# Altium PCB VFD_CLOCK.PcbDoc
Units mil, origin at the board's own origin, x right, y up, seen from the top; angles counter-clockwise.
Board outline 3937.01 x 2519.68 mil, 2 copper layers (Top Layer, Bottom Layer); 41 components, 27 nets, 133 pads, 34 vias.
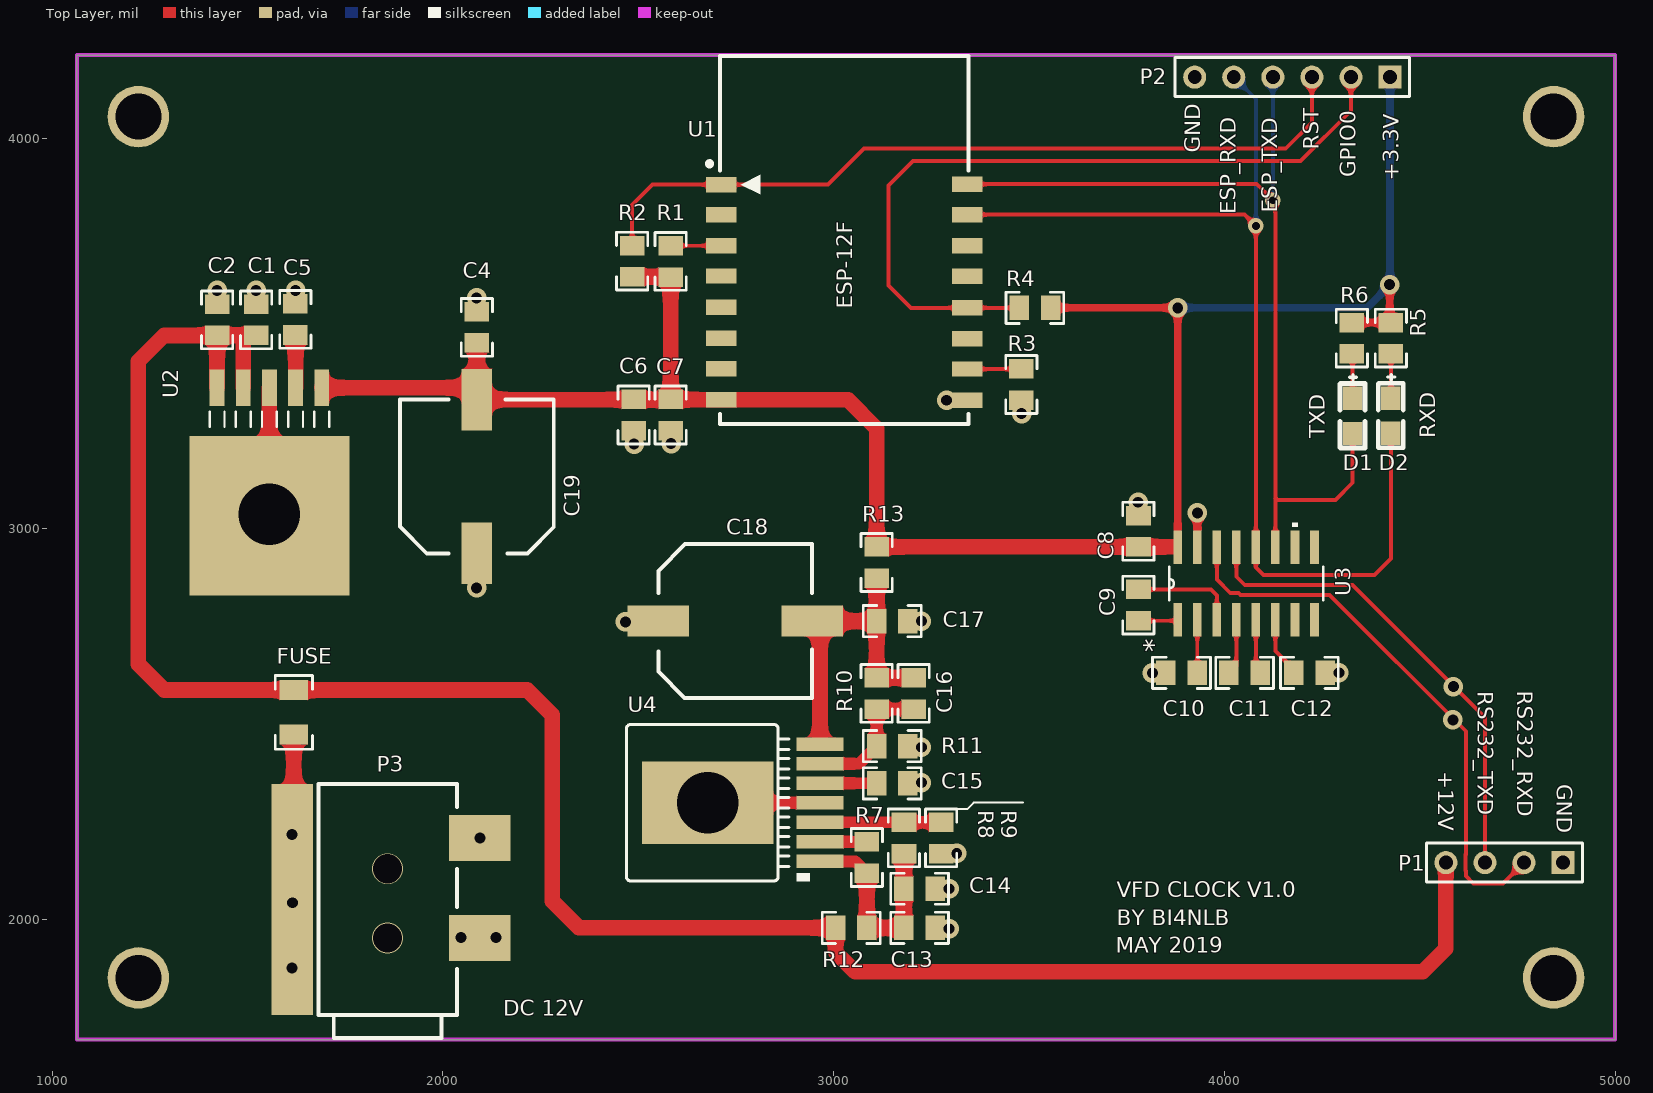
[diagram p0: Top Layer view]
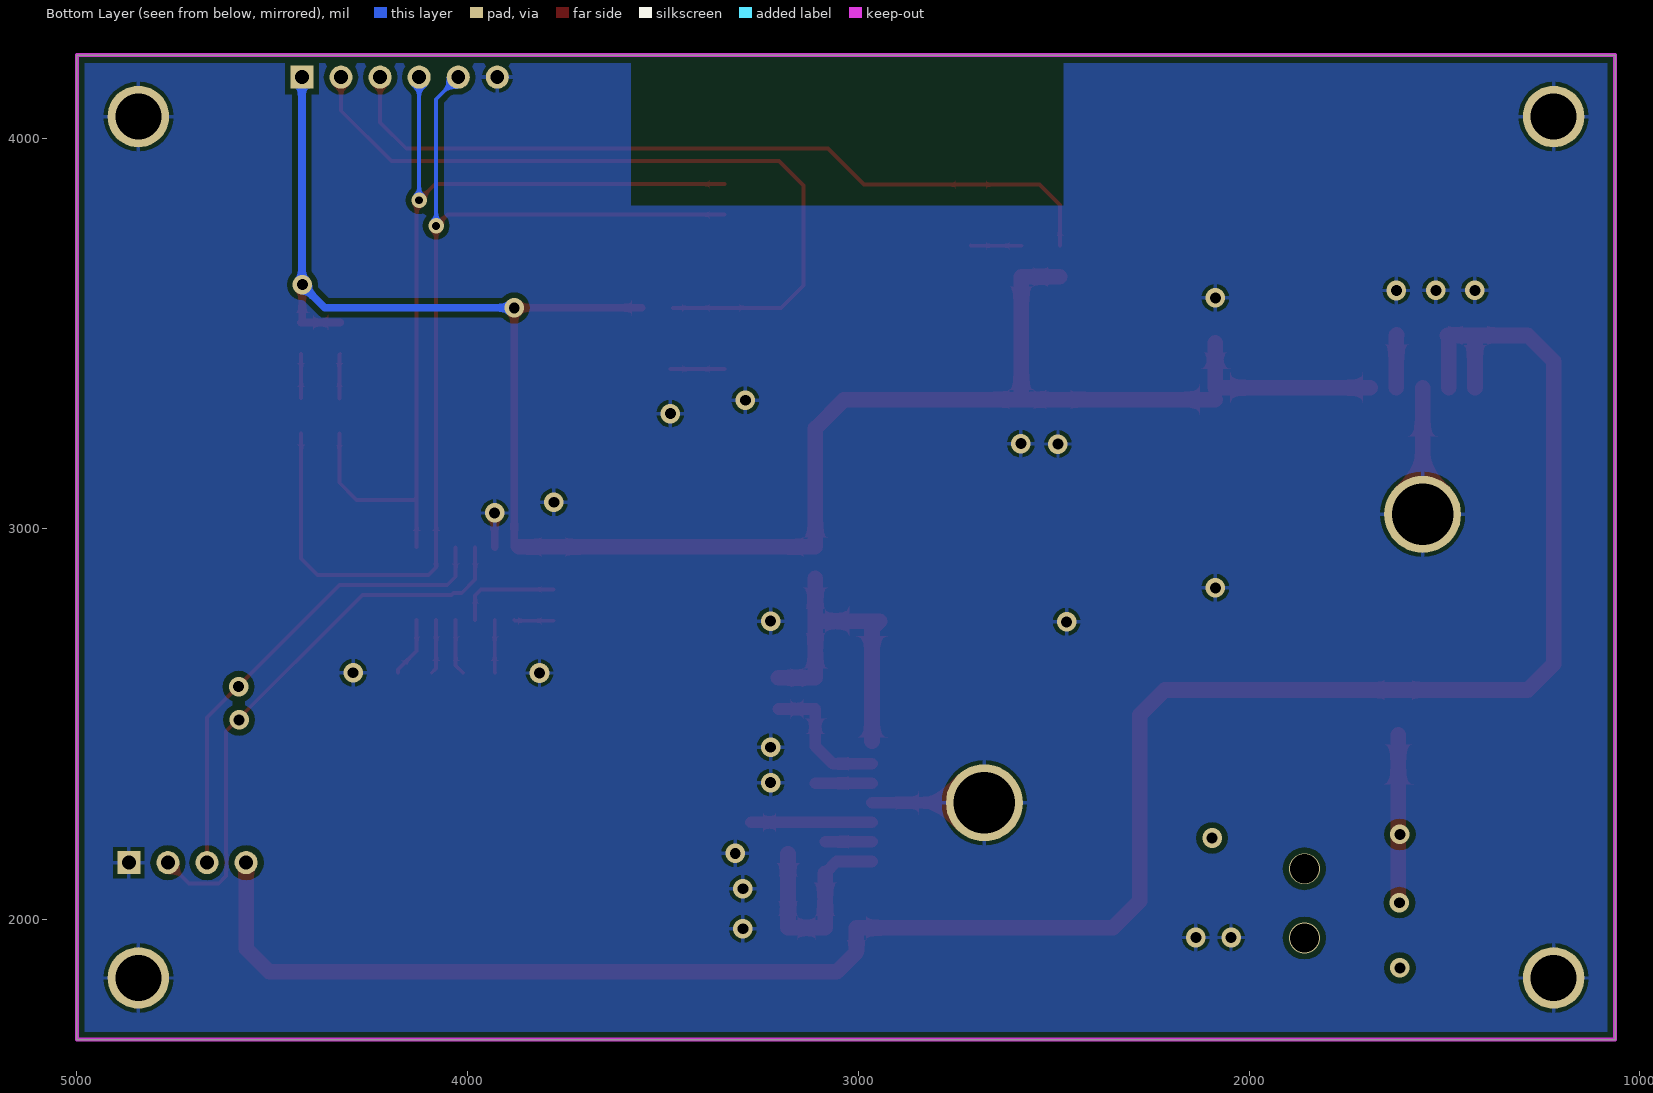
[diagram p1: Bottom Layer view, seen from below]

## Layer stack, top to bottom
Top Solder: solder mask 0.4, Solder Resist, Dk 3.5
Top Layer: signal copper 1.4
Dielectric 1: dielectric 12.6, FR-4, Dk 4.8
Bottom Layer: signal copper 1.4
Bottom Solder: solder mask 0.4, Solder Resist, Dk 3.5

## Board outline
1062.99,1692.91 1062.99,4212.6 5000,4212.6 5000,1692.91

## Design rules (kind name [scope] priority, off if disabled: settings)
Clearance [All] p1: gap=15 ignorepadtopadclearanceinfootprint=FALSE
HoleSize [All] p1: absolutevalues=TRUE maxlimit=200 minlimit=1 maxpercent=80.000 minpercent=20.000
PolygonConnect [All] p1: connectstyle=Relief reliefconductorwidth=10 reliefentries=4 polygonreliefangle="90 Angle" airgapwidth=10
RoutingVias [All] p1: holewidth=28 width=50 viastyle="Through Hole" minholewidth=10 minwidth=20 maxholewidth=28 maxwidth=50
SilkToSilkClearance [All] p1: silktosilkclearance=0
SilkToSolderMaskClearance [IsPad] p1: minsilkscreentomaskgap=0 clearancetoexposedcopper=TRUE
SolderMaskExpansion [All] p1: expansion=4
Width [All] p1: maxlimit=100 minlimit=10 preferedwidth=10 minimp=50.000000 maximp=50.000000 favimp=50.000000
27 further rules are at their usual default settings.

## Components (designator, comment, footprint, x,y, rotation, side; value= is the part's Value field where it differs from the comment)
C1 "0805YD106KAT2A" 0805_HV 1521.77,3534.88 r90 top value=10uF
C2 "08051C103JAT2A" 0805_HV 1421.77,3534.88 r90 top value=0.01uF
C4 "08051C103JAT2A" 0805_HV 2086.61,3515.75 r90 top value=0.01uF
C5 "08051C103JAT2A" 0805_HV 1622.05,3536.07 r90 top value=0.01uF
C6 "0805YD106KAT2A" 0805_HV 2488.19,3291.34 r270 top value=10uF
C7 "08051C103JAT2A" 0805_HV 2582.68,3291.34 r270 top value=0.01uF
C8 "08051C103JAT2A" 0805_HV 3780,2993.78 r90 top value=0.01uF
C9 "08051C103JAT2A" 0805_HV 3780,2804.8 r270 top value=0.01uF
C10 "08051C103JAT2A" 0805_HV 3890.24,2631.57 r180 top value=0.01uF
C11 "08051C103JAT2A" 0805_HV 4051.65,2631.57 r180 top value=0.01uF
C12 "08051C103JAT2A" 0805_HV 4217.64,2631.57 r0 top value=0.01uF
C13 "0805YD106KAT2A" 0805_HV 3219.88,1978.78 r180 top value=10uF
C14 "08051C103JAT2A" 0805_HV 3219.88,2078.78 r180 top value=0.01uF
C15 "08051C103JAT2A" 0805_HV 3149.88,2348.78 r180 top value=0.01uF
C16 "08051C103JAT2A" 0805_HV 3204.88,2578.78 r90 top value=0.01uF
C17 "08051C103JAT2A" 0805_HV 3149.88,2763.78 r180 top value=0.01uF
C18 "100uF" CAP 2944.88,2960.63 r270 top
C19 "100uF" CAP 1889.76,3330.71 r0 top
D1 "RED" LED0805 4328,3289 r270 top
D2 "RED" LED0805 4426.03,3289.31 r270 top
FUSE "" 1206 1618.11,2530.21 r90 top
P1 "Header 4" HDR1X4 4866.93,2145.67 r180 top locked
P2 "Header 6" HDR1X6 4424,4156 r180 top
P3 "Used in BOM report" PWR5.5 2035.43,1755.91 r90 top
R1 "CRCW080510K0FKEA" 0805_HV 2582.68,3684.41 r270 top value=10.0k
R2 "CRCW080510K0FKEA" 0805_HV 2484.25,3685.04 r270 top value=10.0k
R3 "CRCW080510K0FKEA" 0805_HV 3480.32,3369.45 r90 top value=10.0k
R4 "CRCW080510K0FKEA" 0805_HV 3515,3565.59 r180 top value=10.0k
R5 "CRCW080510K0FKEA" 0805_HV 4426,3488 r270 top value=10.0k
R6 "CRCW080510K0FKEA" 0805_HV 4326,3488 r270 top value=10.0k
R7 "CRCW080510K0FKEA" 0805_HV 3084.88,2158.78 r270 top value=10.0k
R8 "CRCW080510K0FKEA" 0805_HV 3179.88,2208.78 r90 top value=10.0k
R9 "CRCW080510K0FKEA" 0805_HV 3274.88,2208.78 r270 top value=10.0k
R10 "CRCW080510K0FKEA" 0805_HV 3109.88,2578.78 r90 top value=10.0k
R11 "CRCW080510K0FKEA" 0805_HV 3149.88,2443.78 r0 top value=10.0k
R12 "CRCW080510K0FKEA" 0805_HV 3044.88,1978.78 r0 top value=10.0k
R13 "CRCW080510K0FKEA" 0805_HV 3109.88,2913.78 r90 top value=10.0k
U1 "ESP-12" ESP_12 2712.13,3880.94 r0 top
U2 "REG104-33" TO-263 1555.69,3037.06 r180 top value=Value
U3 "MAX3232_D_16" D16 4055.59,2859.92 r90 top value=Value
U4 "LMZ14203TZ-ADJ/N" NDW0007A 2677.28,2298.78 r180 top value=Value

## Footprints (in the part's own frame and the unit in brackets; to place one, negate y for a bottom-side part, rotate by r counter-clockwise, add the part's x,y. Pads: shape width x height; smd on the part's side, far side on the other; paste and mask are expansions set on the pad)
0805_HV [mil] "0805 with 30mil clearance between pads"
  rect 50x63 smd: 1(-40,0) 2(40,0)
  silkscreen extent -74,-40 74,40, body extent -43,-29 43,29, height 57
1206 [mm] "1206 from SM-752 data"
  rect 1.3x1.85 smd: 1(-1.45,0) 2(1.45,0)
  silkscreen extent -2.4,-1.21 2.4,1.21, body extent -1.7,-0.9 1.7,0.9, height 1.35
CAP [mm]
  rect 2x4 smd: 1(5,0) 2(5,-10)
  silkscreen extent 0,-10 10,0
D16 [mil]
  rect 86x22 smd: 1(-93,175) 2(-93,125) 3(-93,75) 4(-93,25) 5(-93,-25) 6(-93,-75) 7(-93,-125) 8(-93,-175) 9(93,-175) 10(93,-125) 11(93,-75) 12(93,-25) 13(93,25) 14(93,75) 15(93,125) 16(93,175)
  silkscreen extent -43,-197 156,197, body extent -122,-197 122,197, height 69
ESP_12 [mm]
  rect 2x1 smd: 1(0,0) 2(0,-1.97) 3(0,-3.97) 4(0,-5.94) 5(0,-7.98) 6(0,-9.99) 7(0,-11.98) 8(0,-13.99) 9(16,-14.03) 10(16,-11.99) 11(16,-10.03) 12(16,-8.01) 13(16,-5.95) 14(16,-3.97) 15(16,-1.95) 16(16,0.03)
  silkscreen extent -0.91,-15.57 16.08,8.37
HDR1X4 [mm] "Connector; Header; 4 Position"
  rect 1.5x1.5 hole 0.9: 1(0,0)
  round 1.5 hole 0.9: 2(2.54,0) 3(5.08,0) 4(7.62,0)
  silkscreen extent -1.27,-1.27 8.89,1.27
HDR1X6 [mm] "Connector; Header; 6 Position"
  rect 1.5x1.5 hole 0.9: 1(0,0)
  round 1.5 hole 0.9: 2(2.54,0) 3(5.08,0) 4(7.62,0) 5(10.16,0) 6(12.7,0)
  silkscreen extent -1.27,-1.27 13.97,1.27
LED0805 [mil]
  rect 60x50 smd: 1(-45,0) 2(45,0)
  silkscreen extent -106,-32 82,32
NDW0007A [mm]
  rect 3.06x0.89 smd paste+0 mask+0.051: 1(-7.305,3.81) 2(-7.305,2.54) 3(-7.305,1.27) 4(-7.305,0) 5(-7.305,-1.27) 6(-7.305,-2.54) 7(-7.305,-3.81)
  rect 8.54x5.35 smd paste+0 mask+0.051: 8(0,0)
  silkscreen extent -6.65,-5.09 5.27,5.1, body extent 0,0 0.25,0.25, height 0.25
PWR5.5 [mm]
  rect 15x2.7 smd: 1(7.5,10.7)
  rect 3x4 smd: 2(5,-1.5) 3(11.5,-1.5)
  silkscreen extent -1.5,0 15,9
TO-263 [mil]
  rect 38x94 smd: 1(-134,-324) 2(-67,-324) 3(0,-324) 4(67,-324) 5(134,-324)
  rect 410x408 smd: 6(0,4)
  silkscreen extent -153,-263 153,-224, body extent -205,-278 205,200, height 189

## Part data
C1 C6 C13: "CAP, CERM, 10 µF, 16 V, +/- 10%, X5R, 0805", Cap_Case=0805, Manufacturer=AVX, Supplier Part Number 1=478-5165-1-ND, TempCo=X5R, Tolerance_%=10, Value1=Unknown, Value2=16V, ValueDisplayed=10µF, AEC Category=Q200, AEC Grade=N/A, AEC Qualified=N, Cap_F=0.00001, ComponentLink1Description="Datasheet link", ComponentLink1URL=http://datasheets.avx.com/cx5r.pdf, CompType=Capacitor, LatestRevisionDate=2016-08-09, MountType=SMT, PackageReference=0805, PartNumber=0805YD106KAT2A, Polarized=N, Published=2008-06-19, Publisher="Texas Instruments", RoHS=Y, SizeArea_mm2=2.5, SizeAreaWB_mm2=6.75, SizeX_mm=2, SizeY_mm=1.25, SizeZ_mm=1.45, Supplier 1=Digi-Key, Supplier 2=Mouser, Supplier 3=Farnell, Supplier Part Number 2=581-0805YD106K, Supplier Part Number 3=2281019, SymbolVersion=2008-07-09, TaMax_C=85, TaMin_C=-55, Technology=Ceramic, U/M=EA, VDC_V=16
C2 C4 C5 C7 C8 C9 C10 C11 C12 C14: "CAP, CERM, 0.01 µF, 100 V, +/- 5%, X7R, 0805", Cap_Case=0805, Manufacturer=AVX, Supplier Part Number 1=478-3745-1-ND, TempCo=X7R, Tolerance_%=5, Value1="0.078 ohm", Value2=100V, ValueDisplayed=0.1µF, AEC Category=Q200, AEC Grade=N/A, AEC Qualified=N, Cap_F=0.00000001, ComponentLink1Description="Datasheet link", ComponentLink1URL=http://datasheets.avx.com/X7RDielectric.pdf, CompType=Capacitor, ESR_ohm=0.078, LatestRevisionDate=2016-08-09, MountType=SMT, PackageReference=0805, PartNumber=08051C103JAT2A, Polarized=N, Published=2008-06-19, Publisher="Texas Instruments", RoHS=Y, SizeArea_mm2=2.5, SizeAreaWB_mm2=6.75, SizeX_mm=2, SizeY_mm=1.25, SizeZ_mm=1.45, Supplier 1=Digi-Key, Supplier 2=Mouser, Supplier 3=Farnell, Supplier Part Number 2=581-08051C103J, Supplier Part Number 3=1396066, SymbolVersion=2008-07-09, TaMax_C=125, TaMin_C=-55, Technology=Ceramic, U/M=EA, VDC_V=100
C15 C16: "CAP, CERM, 0.01 µF, 100 V, +/- 5%, X7R, 0805", Cap_Case=0805, Manufacturer=AVX, Supplier Part Number 1=478-3745-1-ND, TempCo=X7R, Tolerance_%=5, Value1="0.078 ohm", Value2=100V, ValueDisplayed=22nF, AEC Category=Q200, AEC Grade=N/A, AEC Qualified=N, Cap_F=0.00000001, ComponentLink1Description="Datasheet link", ComponentLink1URL=http://datasheets.avx.com/X7RDielectric.pdf, CompType=Capacitor, ESR_ohm=0.078, LatestRevisionDate=2016-08-09, MountType=SMT, PackageReference=0805, PartNumber=08051C103JAT2A, Polarized=N, Published=2008-06-19, Publisher="Texas Instruments", RoHS=Y, SizeArea_mm2=2.5, SizeAreaWB_mm2=6.75, SizeX_mm=2, SizeY_mm=1.25, SizeZ_mm=1.45, Supplier 1=Digi-Key, Supplier 2=Mouser, Supplier 3=Farnell, Supplier Part Number 2=581-08051C103J, Supplier Part Number 3=1396066, SymbolVersion=2008-07-09, TaMax_C=125, TaMin_C=-55, Technology=Ceramic, U/M=EA, VDC_V=100
C17: "CAP, CERM, 0.01 µF, 100 V, +/- 5%, X7R, 0805", Cap_Case=0805, Manufacturer=AVX, Supplier Part Number 1=478-3745-1-ND, TempCo=X7R, Tolerance_%=5, Value1="0.078 ohm", Value2=100V, ValueDisplayed=0.1uF, AEC Category=Q200, AEC Grade=N/A, AEC Qualified=N, Cap_F=0.00000001, ComponentLink1Description="Datasheet link", ComponentLink1URL=http://datasheets.avx.com/X7RDielectric.pdf, CompType=Capacitor, ESR_ohm=0.078, LatestRevisionDate=2016-08-09, MountType=SMT, PackageReference=0805, PartNumber=08051C103JAT2A, Polarized=N, Published=2008-06-19, Publisher="Texas Instruments", RoHS=Y, SizeArea_mm2=2.5, SizeAreaWB_mm2=6.75, SizeX_mm=2, SizeY_mm=1.25, SizeZ_mm=1.45, Supplier 1=Digi-Key, Supplier 2=Mouser, Supplier 3=Farnell, Supplier Part Number 2=581-08051C103J, Supplier Part Number 3=1396066, SymbolVersion=2008-07-09, TaMax_C=125, TaMin_C=-55, Technology=Ceramic, U/M=EA, VDC_V=100
C18 C19: library part Cap_100uF, Alternate Manufacturer=-, Manufacturer="Used in BOM report", Alternate PartNumber=-, ComponentLink1Description="Datasheet Link", CompType="Used in some BOM reports.  Useful for finding later.", MountType="SMT, TH, or N/A", PackageReference="eg:  0603, used in PnP report", PartNumber="Used in BOM report", RoHS="Used in BOM report.  Use Y or N."
D1 D2: library part LED, "LED发光管"
FUSE: library part R, "电阻"
P1: "Header, 4-Pin", LatestRevisionDate=17-Jul-2002, LatestRevisionNote="Re-released for DXP Platform.", Publisher="Altium Limited"
P2: "Header, 6-Pin", LatestRevisionDate=17-Jul-2002, LatestRevisionNote="Re-released for DXP Platform.", Publisher="Altium Limited"
P3: library part PWR5.5, Alternate Manufacturer=-, Alternate PartNumber=-, ComponentLink1Description="Datasheet Link", CompType="Used in some BOM reports.  Useful for finding later.", Manufacturer="Used in BOM report", MountType="SMT, TH, or N/A", PackageReference="eg:  0603, used in PnP report", PartNumber="Used in BOM report", RoHS="Used in BOM report.  Use Y or N."
R1 R2 R3 R4: "RES, 10.0 k, 1%, 0.125 W, 0805", Manufacturer=Vishay-Dale, Power_W=0.125, Supplier Part Number 1=541-10.0KCCT-ND, TempCo="100 ppm/C", Tolerance_%=1, Value1=1%, Value2=0.125W, Value_Code=10k0, ValueDisplayed=10.0k, AEC Category=Q200, AEC Qualified=?, ComponentLink1Description="Datasheet link", ComponentLink1URL=http://www.vishay.com/docs/20035/dcrcwe3.pdf, CompType=Resistor, EIA_Code=E96, LatestRevisionDate=2016-08-02, MountType=SMT, PackageReference=0805, PartNumber=CRCW080510K0FKEA, Published=2008-06-26, Publisher="Texas Instruments", Res_ohm=10000, RoHS=Y, SizeArea_mm2=2.5, SizeX_mm=2, SizeY_mm=1.25, SizeZ_mm=1.45, Supplier 1=Digi-Key, Supplier 2=Mouser, Supplier 3=Farnell, Supplier Part Number 2=71-CRCW0805-10K-E3, Supplier Part Number 3=1469856, SymbolVersion=2009-05-29, Technology="Thick Film", U/M=EA, VDC_V=150
R5 R6: "RES, 10.0 k, 1%, 0.125 W, 0805", Manufacturer=Vishay-Dale, Power_W=0.125, Supplier Part Number 1=541-10.0KCCT-ND, TempCo="100 ppm/C", Tolerance_%=1, Value1=1%, Value2=0.125W, Value_Code=10k0, ValueDisplayed=1.0k, AEC Category=Q200, AEC Qualified=?, ComponentLink1Description="Datasheet link", ComponentLink1URL=http://www.vishay.com/docs/20035/dcrcwe3.pdf, CompType=Resistor, EIA_Code=E96, LatestRevisionDate=2016-08-02, MountType=SMT, PackageReference=0805, PartNumber=CRCW080510K0FKEA, Published=2008-06-26, Publisher="Texas Instruments", Res_ohm=10000, RoHS=Y, SizeArea_mm2=2.5, SizeX_mm=2, SizeY_mm=1.25, SizeZ_mm=1.45, Supplier 1=Digi-Key, Supplier 2=Mouser, Supplier 3=Farnell, Supplier Part Number 2=71-CRCW0805-10K-E3, Supplier Part Number 3=1469856, SymbolVersion=2009-05-29, Technology="Thick Film", U/M=EA, VDC_V=150
R7: "RES, 10.0 k, 1%, 0.125 W, 0805", Manufacturer=Vishay-Dale, Power_W=0.125, Supplier Part Number 1=541-10.0KCCT-ND, TempCo="100 ppm/C", Tolerance_%=1, Value1=1%, Value2=0.125W, Value_Code=10k0, ValueDisplayed=61.9k, AEC Category=Q200, AEC Qualified=?, ComponentLink1Description="Datasheet link", ComponentLink1URL=http://www.vishay.com/docs/20035/dcrcwe3.pdf, CompType=Resistor, EIA_Code=E96, LatestRevisionDate=2016-08-02, MountType=SMT, PackageReference=0805, PartNumber=CRCW080510K0FKEA, Published=2008-06-26, Publisher="Texas Instruments", Res_ohm=10000, RoHS=Y, SizeArea_mm2=2.5, SizeX_mm=2, SizeY_mm=1.25, SizeZ_mm=1.45, Supplier 1=Digi-Key, Supplier 2=Mouser, Supplier 3=Farnell, Supplier Part Number 2=71-CRCW0805-10K-E3, Supplier Part Number 3=1469856, SymbolVersion=2009-05-29, Technology="Thick Film", U/M=EA, VDC_V=150
R8: "RES, 10.0 k, 1%, 0.125 W, 0805", Manufacturer=Vishay-Dale, Power_W=0.125, Supplier Part Number 1=541-10.0KCCT-ND, TempCo="100 ppm/C", Tolerance_%=1, Value1=1%, Value2=0.125W, Value_Code=10k0, ValueDisplayed=68.1k, AEC Category=Q200, AEC Qualified=?, ComponentLink1Description="Datasheet link", ComponentLink1URL=http://www.vishay.com/docs/20035/dcrcwe3.pdf, CompType=Resistor, EIA_Code=E96, LatestRevisionDate=2016-08-02, MountType=SMT, PackageReference=0805, PartNumber=CRCW080510K0FKEA, Published=2008-06-26, Publisher="Texas Instruments", Res_ohm=10000, RoHS=Y, SizeArea_mm2=2.5, SizeX_mm=2, SizeY_mm=1.25, SizeZ_mm=1.45, Supplier 1=Digi-Key, Supplier 2=Mouser, Supplier 3=Farnell, Supplier Part Number 2=71-CRCW0805-10K-E3, Supplier Part Number 3=1469856, SymbolVersion=2009-05-29, Technology="Thick Film", U/M=EA, VDC_V=150
R9: "RES, 10.0 k, 1%, 0.125 W, 0805", Manufacturer=Vishay-Dale, Power_W=0.125, Supplier Part Number 1=541-10.0KCCT-ND, TempCo="100 ppm/C", Tolerance_%=1, Value1=1%, Value2=0.125W, Value_Code=10k0, ValueDisplayed=11.8k, AEC Category=Q200, AEC Qualified=?, ComponentLink1Description="Datasheet link", ComponentLink1URL=http://www.vishay.com/docs/20035/dcrcwe3.pdf, CompType=Resistor, EIA_Code=E96, LatestRevisionDate=2016-08-02, MountType=SMT, PackageReference=0805, PartNumber=CRCW080510K0FKEA, Published=2008-06-26, Publisher="Texas Instruments", Res_ohm=10000, RoHS=Y, SizeArea_mm2=2.5, SizeX_mm=2, SizeY_mm=1.25, SizeZ_mm=1.45, Supplier 1=Digi-Key, Supplier 2=Mouser, Supplier 3=Farnell, Supplier Part Number 2=71-CRCW0805-10K-E3, Supplier Part Number 3=1469856, SymbolVersion=2009-05-29, Technology="Thick Film", U/M=EA, VDC_V=150
R10: "RES, 10.0 k, 1%, 0.125 W, 0805", Manufacturer=Vishay-Dale, Power_W=0.125, Supplier Part Number 1=541-10.0KCCT-ND, TempCo="100 ppm/C", Tolerance_%=1, Value1=1%, Value2=0.125W, Value_Code=10k0, ValueDisplayed=3.32k, AEC Category=Q200, AEC Qualified=?, ComponentLink1Description="Datasheet link", ComponentLink1URL=http://www.vishay.com/docs/20035/dcrcwe3.pdf, CompType=Resistor, EIA_Code=E96, LatestRevisionDate=2016-08-02, MountType=SMT, PackageReference=0805, PartNumber=CRCW080510K0FKEA, Published=2008-06-26, Publisher="Texas Instruments", Res_ohm=10000, RoHS=Y, SizeArea_mm2=2.5, SizeX_mm=2, SizeY_mm=1.25, SizeZ_mm=1.45, Supplier 1=Digi-Key, Supplier 2=Mouser, Supplier 3=Farnell, Supplier Part Number 2=71-CRCW0805-10K-E3, Supplier Part Number 3=1469856, SymbolVersion=2009-05-29, Technology="Thick Film", U/M=EA, VDC_V=150
R11: "RES, 10.0 k, 1%, 0.125 W, 0805", Manufacturer=Vishay-Dale, Power_W=0.125, Supplier Part Number 1=541-10.0KCCT-ND, TempCo="100 ppm/C", Tolerance_%=1, Value1=1%, Value2=0.125W, Value_Code=10k0, ValueDisplayed=1.07k, AEC Category=Q200, AEC Qualified=?, ComponentLink1Description="Datasheet link", ComponentLink1URL=http://www.vishay.com/docs/20035/dcrcwe3.pdf, CompType=Resistor, EIA_Code=E96, LatestRevisionDate=2016-08-02, MountType=SMT, PackageReference=0805, PartNumber=CRCW080510K0FKEA, Published=2008-06-26, Publisher="Texas Instruments", Res_ohm=10000, RoHS=Y, SizeArea_mm2=2.5, SizeX_mm=2, SizeY_mm=1.25, SizeZ_mm=1.45, Supplier 1=Digi-Key, Supplier 2=Mouser, Supplier 3=Farnell, Supplier Part Number 2=71-CRCW0805-10K-E3, Supplier Part Number 3=1469856, SymbolVersion=2009-05-29, Technology="Thick Film", U/M=EA, VDC_V=150
R12 R13: "RES, 10.0 k, 1%, 0.125 W, 0805", Manufacturer=Vishay-Dale, Power_W=0.125, Supplier Part Number 1=541-10.0KCCT-ND, TempCo="100 ppm/C", Tolerance_%=1, Value1=1%, Value2=0.125W, Value_Code=10k0, ValueDisplayed=0, AEC Category=Q200, AEC Qualified=?, ComponentLink1Description="Datasheet link", ComponentLink1URL=http://www.vishay.com/docs/20035/dcrcwe3.pdf, CompType=Resistor, EIA_Code=E96, LatestRevisionDate=2016-08-02, MountType=SMT, PackageReference=0805, PartNumber=CRCW080510K0FKEA, Published=2008-06-26, Publisher="Texas Instruments", Res_ohm=10000, RoHS=Y, SizeArea_mm2=2.5, SizeX_mm=2, SizeY_mm=1.25, SizeZ_mm=1.45, Supplier 1=Digi-Key, Supplier 2=Mouser, Supplier 3=Farnell, Supplier Part Number 2=71-CRCW0805-10K-E3, Supplier Part Number 3=1469856, SymbolVersion=2009-05-29, Technology="Thick Film", U/M=EA, VDC_V=150
U2: "Imported", Manufacturer_Part_Number=lp38502ts-adjnopb, RefDes=RefDes, TYPE=Type, Vendor=National
U3: "Imported", Manufacturer="Texas Instruments", Manufacturer_Part_Number=max3232_d_16, PACKAGE_DESIGNATOR=D, Datasheet_URL=http://www.ti.com/lit/gpn/MAX3232, FAMILY_NAME=RS-232, GENERIC_PART_NUMBER=MAX3232, INDUSTRY_STD_PKG_TYPE=SOIC, PIN_COUNT=16, RefDes=RefDes, TYPE=Type, Vendor="Texas Instruments"
U4: "Imported", Manufacturer="Texas Instruments", PartNumber=LMZ14203TZ-ADJ/NOPB, RefDes=RefDes, TYPE=TYPE

## Free pads (board coordinates)
  round 157.48 hole 118.11: 1(1220.47,1850.39) 1(1220.47,4055.12) 1(4842.52,1850.39) 1(4842.52,4055.12)
  round 196.85 hole 157.48: 1(1555.69,3037.06) 1(2677.28,2298.78)

## Via types
v1: diameter 50, hole 28, Top Layer to Bottom Layer, 30 vias
v2: diameter 78.74, hole 74.8, Top Layer to Bottom Layer, 2 vias
v3: diameter 40, hole 20, Top Layer to Bottom Layer, 2 vias

## Nets (pads, with @x,y where several pads share a name; then routed paths per layer and width w, separated by ;. In a path a pad name is that pad's centre, name@x,y a point inside that pad or via, vN(x,y) a via of type N, cw(c..) or ccw(c..) an arc to the next point about the centre after c; other vN are vias at no path point)
+3.3V: C4.1 C6.1 C7.1 C8.1 C19.1 P2.1 R1.2 R2.2 R4.1 R5.1 R6.1 R13.2 U1.8 U2.1 U3.16 | length 5306
  Top Layer w20: C19.1 C19.1@2086.61,3361.06 ; R4.1 v1(3880.59,3565.59) U3.16 ; R6.1 R5.1 4423,3531 v1(4423,3625)
  Top Layer w40: U2.1 2086.61,3361.06 C4.1 ; C19.1 2711.57,3330.71 U1.8 3036.84,3330.16 3109.88,3257.12 R13.2 C8.1 3869,2953.78 ; R2.2 2582.05,3645.04 R1.2 C7.1
  Bottom Layer w20: v1(3880.59,3565.59) 4365.59,3565.59 4424,3624 P2.1
+12V: C1.1 C2.1 FUSE.2 P1.4 R12.1 U2.4 U2.5 | length 5576.4
  Top Layer w30: C2.1@1421.69,3494.8 C2.1
  Top Layer w40: U2.5 C2.1@1421.69,3494.8 ; U2.4 1488.69,3491.45 1492.13,3494.88 C2.1 1286.22,3494.88 1220.47,3429.13 1220.47,2653.54 1286.72,2587.3 FUSE.2 2215.85,2587.3 2279.53,2523.62 2279.53,2047.24 2347.99,1978.78 R12.1 3004.88,1916.38 3055.26,1866 4507,1866 4566.93,1925.93 P1.4
ESP_RXD: D2.2 P2.5 U1.15 U3.12 | length 2719.7
  Top Layer w10: U1.15 4051.83,3804.17 v3(4080.59,3775.41) U3.12 4080.59,2901.41 4100,2882 4384,2882 4426.03,2924.03 D2.2
  Bottom Layer w10: P2.5 4080.59,4099.41 v3(4080.59,3775.41)
ESP_TXD: D1.2 P2.4 U1.16 U3.11 | length 2347.7
  Top Layer w10: U1.16 4082.87,3882.13 v3(4124,3841) 4130.59,3834.41 4130.59,3145 4130.59,3077 ; U3.11 4130.59,3077 ; D1.2 4328,3118 4284,3074 4133.59,3074 4130.59,3077
  Bottom Layer w10: v3(4124,3841) P2.4
GND: C1.2 C2.2 C4.2 C5.2 C6.2 C7.2 C8.2 C10.2 C12.2 C13.1 C14.1 C15.1 C17.1 C18.2 C19.2 P1.1 P2.6 P3.2 pad.1 R3.1 R9.2 R11.2 U1.9 U2.3 U2.6 U3.15 U4.4 U4.8 | length 703.3
  Top Layer w20: U3.15 v1(3930.59,3040.59)
  Top Layer w30: U4.8 U4.4
  Top Layer w40: U2.6 U2.3
  other v1: 2046,1954 2136,1954 3295.28,1976.38 3295.28,2078.74 3314.96,2169.29 3224.41,2350.39 3224.41,2440.94 3816,2631 4293,2631.57 2467,2762 3224.41,2763.78 2085.93,2849 3779,3068 2489,3217 2584,3218 3481,3295 3289,3329 2085.93,3590.94 1421.77,3610.24 1521.77,3610.24 1622.69,3610
GPIO0: P2.2 R4.2 U1.12 | length 1962.7
  Top Layer w10: R4.2 U1.12 3197.41,3565.59 3140.71,3622.29 3140.71,3878.71 3203,3941 4195,3941 4324,4070 P2.2
NetC5_1: C5.1 U2.2 | length 135.3
  Top Layer w40: C5.1 1622.69,3495.42 U2.2
NetC9_1: C9.1 U3.3 | length 269.5
  Top Layer w10: C9.1 3965.19,2844.81 3980.59,2829.41 U3.3
NetC9_2: C9.2 U3.1 | length 101.5
  Top Layer w10: C9.2 3878.47,2764.81 U3.1
NetC10_1: C10.1 U3.2 | length 135.5
  Top Layer w10: C10.1 3930.59,2631.93 U3.2
NetC11_1: C11.1 U3.5 | length 139.9
  Top Layer w10: U3.5 4080.59,2642.64 C11.1
NetC11_2: C11.2 U3.4 | length 143.2
  Top Layer w10: C11.2 4030.59,2650.51 U3.4
NetC12_1: C12.1 U3.6 | length 154.8
  Top Layer w10: U3.6 4130.59,2687.41 4177.64,2640.36 C12.1
NetC13_2: C13.2 C14.2 R7.2 R8.1 R12.2 U4.1 | length 557.4
  Top Layer w30: U4.1 3054.88,2148.78 R7.2
  Top Layer w40: R7.2 R12.2 C13.2 C14.2 R8.1
NetC15_2: C15.2 U4.5 | length 145
  Top Layer w30: U4.5 C15.2
NetC16_1: C16.1 R10.1 R11.1 U4.6 | length 353.6
  Top Layer w30: U4.6 3064.88,2398.78 R11.1 R10.1 C16.1
NetC16_2: C16.2 C17.2 C18.1 R10.2 R13.1 U4.7 | length 830.1
  Top Layer w40: U4.7@2964.88,2457 2964.88,2743.78 C18.1 C17.2 ; R13.1 C17.2 ; C16.2 R10.2 C17.2
NetD1_1: D1.1 R6.2 | length 114.8
  Top Layer w10: R6.2 4328,3446 D1.1
NetD2_1: D2.1 R5.2 | length 113.7
  Top Layer w10: D2.1 R5.2
NetFUSE_1: FUSE.1 P3.1 | length 431.4
  Top Layer w40: v1(1615,2043) 1615,2052.01 1618.11,2055.12 FUSE.1
  other v1: 1614,1876 1614,2218
NetR1_1: R1.1 U1.3 | length 129.5
  Top Layer w10: R1.1 2711.89,3724.41 U1.3
NetR3_2: R3.2 U1.10 | length 138.5
  Top Layer w10: U1.10 3479.76,3408.9 R3.2
NetR7_1: R7.1 U4.2 | length 120
  Top Layer w30: U4.2 R7.1
NetR8_2: R8.2 R9.1 U4.3 | length 310
  Top Layer w30: U4.3 R9.1
RS232_RXD: P1.2 U3.14 | length 1431.3
  Top Layer w10: U3.14 3980.59,2870.41 4015,2836 4036.64,2836 4041.64,2831 4269,2831 4618,2482 4618,2166.78 4617.4,2166.18 4617.4,2125.15 4618,2124.56 4618,2111 4637,2092 4713.26,2092 P1.2
  other v1: 4585,2511
RS232_TXD: P1.3 U3.13 | length 1232.5
  Top Layer w10: U3.13 4030.59,2877.41 4052,2856 4328,2856 4666.93,2517.07 P1.3
  other v1: 4586,2596
RST: P2.3 R2.1 U1.1 | length 2047.3
  Top Layer w10: R2.1 2484.25,3829.25 2535.94,3880.94 U1.1 2985.94,3880.94 3078,3973 4157,3973 4224,4040 P2.3
pads on no net: P3.3 U1.2 U1.4 U1.5 U1.6 U1.7 U1.11 U1.13 U1.14 U3.7 U3.8 U3.9 U3.10
copper on no net:
  other v1: 2094.49,2208.66
  other v2: 1858.27,1952.76 1858.27,2129.92

## Polygon pours and split planes (outlines as drawn)
GND on Bottom Layer "GND_L02_P008" (solid, remove dead copper, pour order 8): 1062.99,4212.6 5000,4212.6 5000,1692.91 4996.06,1696.85 1062.99,1696.85
no net on Bottom Layer "NONET_L02_P006" (solid, remove dead copper, pour order 6): 4966,2729

## Keep-outs
Keep-Out Layer:
  the board outline again, w10

## Other copper
Bottom Layer:
  pour cut-out: 2474,3827 3582.68,3827 3582.68,4213 2474,4213

## Silkscreen, mask and mechanical layers (free items; w line width, h text height)
Top Overlay:
  lines w5: 3314.88,2282.78 3341.83,2282.78 3358.27,2299.21 3484.25,2299.21
  text "RST" at 4241.74,3970.82 h40 r90
  text "GND" at 3938.59,3962.94 h40 r90
  text "GPIO0" at 4336.23,3899.95 h40 r90
  text "+3.3V" at 4446,3891 h40 r90
  text "ESP_TXD" at 4135.44,3809.4 h40 r90
  text "ESP_RXD" at 4029.14,3805.46 h40 r90
  text "ESP-12F" at 3047,3563 h40 r90
  text "TXD" at 4257,3232 h40 r90
  text "RXD" at 4539.37,3232.28 h40 r90
  text "RS232_RXD" at 4749,2585 h40 r270
  text "RS232_TXD" at 4649,2584 h40 r270
  text "+12V" at 4547,2380 h40 r270
  text "GND" at 4851,2346 h40 r270
  text "VFD CLOCK V1.0" at 3724,2057 h40
  text "BY BI4NLB" at 3724,1985 h40
  text "MAY 2019" at 3722,1915 h40
  text "DC 12V" at 2154,1754 h40
Mechanical 1:
  the board outline again, w10

## Text inside footprints (layer, text, board x,y; h text height)
U1: Mechanical 13 "ANTENNA AREA" at 2717.13,4190.94 h10; Mechanical 13 "CUTOUT POLYGON" at 2717.13,4170.94 h10
U2: Mechanical 13 "*" at 1748.19,3361.06 h50 r180
U3: Mechanical 13 "*" at 3843,2684 h50 r90; Top Overlay "*" at 3843,2684 h50 r90